# EAGLE board YaoGuai_SOUND_v1 (EAGLE 8.1.1)
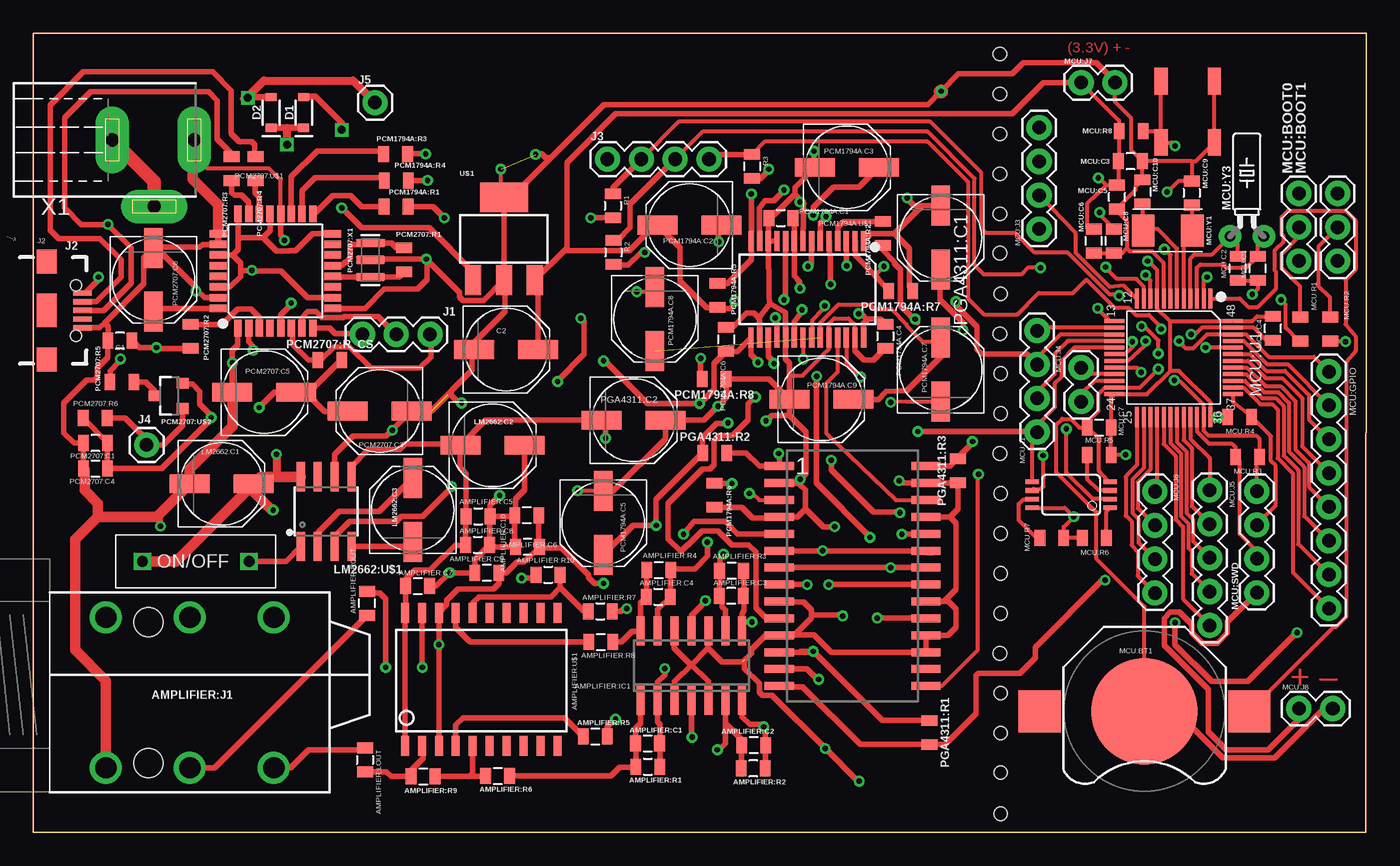
[diagram p0: board, top side]
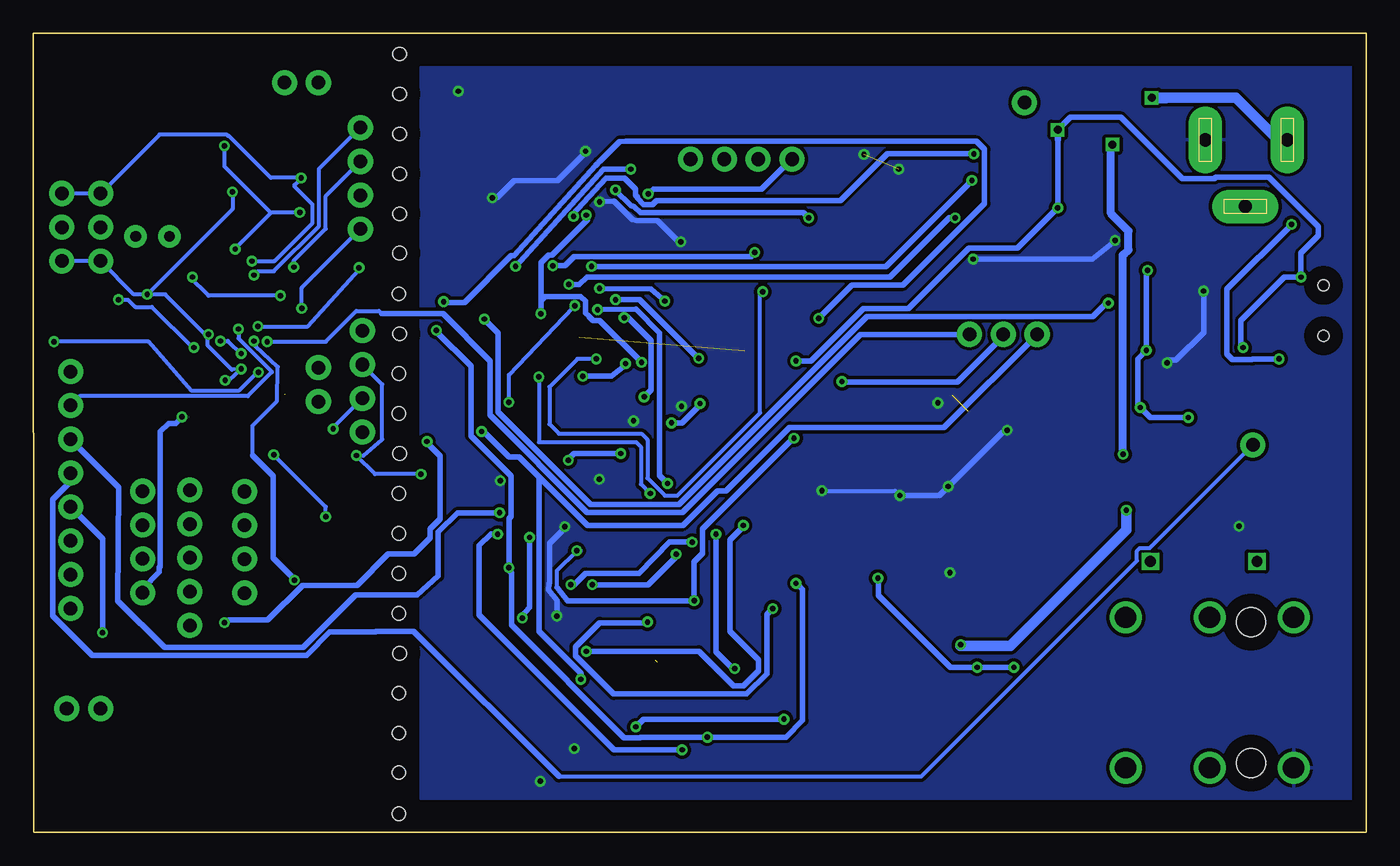
[diagram p1: board, bottom side, seen from below]

Size 100.05 x 60 mm. Coordinates in mm from the lower left corner, seen from the top.
Outline: 0,60 100.05,60 100,0 0,0 0,60
Copper layers (1*16): Top 0.035mm / dielectric 1.5mm / Bottom 0.035mm
Design rules "default *": minimum track width 10mil, minimum drill 24mil, track to track 8mil, track to pad 8mil, pad to pad 8mil, via to via 8mil, smd to smd 8mil, copper to edge 40mil, drill to drill 8mil, minimum pad ring 10mil, minimum via ring 8mil, stop-mask expansion 4mil, vias tented up to drill 0mil, thermal gap 10mil
Holes 1 mm at 72.6,1.4 72.6,4.5 72.6,7.45 72.6,10.45 72.55,13.45 72.6,16.45 72.6,19.45 72.6,22.45 72.6,25.45 72.55,28.45 72.6,31.45 72.6,34.45 72.55,37.45 72.6,40.45 72.55,43.5 72.55,46.45 72.55,49.45 72.55,52.45 72.55,55.45 72.55,58.45

## Footprints (pad centres in the part's own frame; a part is rotated, then mirrored left to right if it is on the bottom)
0805 = smd 0.8 x 1.2: 1 -0.9,0; 2 0.9,0
SO14 = smd 0.6 x 2.2: 1 -3.81,-2.6; 2 -2.54,-2.6; 3 -1.27,-2.6; 4 0,-2.6; 5 1.27,-2.6; 6 2.54,-2.6; 7 3.81,-2.6; 8 3.81,2.6; 9 2.54,2.6; 10 1.27,2.6; 11 0,2.6; 12 -1.27,2.6; 13 -2.54,2.6; 14 -3.81,2.6
AUDIO_JACK_0.25"_TRS_PTH_RA = drill 1.6: RING 10.5,-6.95; RING-NORM 10.5,4.35; SLEEVE 4.2,-6.95; SLEEVE-NORM 4.2,4.35; TIP 16.8,-6.95; TIP-NORM 16.8,4.35 | hole 2.2: 7.4,4; 7.4,-6.6
SOIC20S = smd 0.6 x 1.5: 1 -5.715,-5; 2 -4.445,-5; 3 -3.175,-5; 4 -1.905,-5; 5 -0.635,-5; 6 0.635,-5; 7 1.905,-5; 8 3.175,-5; 9 4.445,-5; 10 5.715,-5; 11 5.715,5; 12 4.445,5; 13 3.175,5; 14 1.905,5; 15 0.635,5; 16 -0.635,5; 17 -1.905,5; 18 -3.175,5; 19 -4.445,5; 20 -5.715,5
PANASONIC_D = smd 3 x 1.4: + 2.4,0; - -2.4,0
SOD-323 = smd 0.63 x 0.83: A 1.15,0; C -1.15,0
1X03 = drill 1.016 pad 1.88: 1 0,0; 2 2.54,0; 3 5.08,0
USB-AB-MICRO-SMD = smd 1.4 x 0.4: D+1 2.7,0; D-1 2.7,0.65; GND1 2.7,-1.3; ID1 2.7,-0.65; VBUS1 2.7,1.3 | smd 1.5 x 1.8: SHLD1 0,-3.68; SHLD2 0,3.68 | smd 1.5 x 2.5: SHLD3 0,0 | hole 0.85: 2.2,1.9; 2.2,-1.9
1X04 = drill 1.016 pad 1.88: 1 0,0; 2 2.54,0; 3 5.08,0; 4 7.62,0
1X01 = drill 1.016 pad 1.88: 1 0,0
SOIC-8 = smd 0.61 x 2.21: 1 -1.905,-2.616; 2 -0.635,-2.616; 3 0.635,-2.616; 4 1.905,-2.616; 5 1.905,2.616; 6 0.635,2.616; 7 -0.635,2.616; 8 -1.905,2.616
RED_SWITCH = drill 0.8 square: P$1 -4,0; P$2 4,0
BATTCON_12MM = smd 8 x 8: GND 0,0 | smd 3.175 x 3.175: PWR@1 -7.874,0; PWR@2 7.874,0
1X08 = drill 1.016 pad 1.88: 1 0,0; 2 2.54,0; 3 5.08,0; 4 7.62,0; 5 10.16,0; 6 12.7,0; 7 15.24,0; 8 17.78,0
1X02 = drill 1.016 pad 1.88: 1 0,0; 2 2.54,0
1X05 = drill 1.016 pad 1.88: 1 0,0; 2 2.54,0; 3 5.08,0; 4 7.62,0; 5 10.16,0
LQFP48-0.5-7X7MM = smd 1.5 x 0.3: 1 -4.45,2.75; 2 -4.45,2.25; 3 -4.45,1.75; 4 -4.45,1.25; 5 -4.45,0.75; 6 -4.45,0.25; 7 -4.45,-0.25; 8 -4.45,-0.75; 9 -4.45,-1.25; 10 -4.45,-1.75; 11 -4.45,-2.25; 12 -4.45,-2.75; 25 4.45,-2.75; 26 4.45,-2.25; 27 4.45,-1.75; 28 4.45,-1.25; 29 4.45,-0.75; 30 4.45,-0.25; 31 4.45,0.25; 32 4.45,0.75; 33 4.45,1.25; 34 4.45,1.75; 35 4.45,2.25; 36 4.45,2.75 | smd 0.3 x 1.5: 13 -2.75,-4.45; 14 -2.25,-4.45; 15 -1.75,-4.45; 16 -1.25,-4.45; 17 -0.75,-4.45; 18 -0.25,-4.45; 19 0.25,-4.45; 20 0.75,-4.45; 21 1.25,-4.45; 22 1.75,-4.45; 23 2.25,-4.45; 24 2.75,-4.45; 37 2.75,4.45; 38 2.25,4.45; 39 1.75,4.45; 40 1.25,4.45; 41 0.75,4.45; 42 0.25,4.45; 43 -0.25,4.45; 44 -0.75,4.45; 45 -1.25,4.45; 46 -1.75,4.45; 47 -2.25,4.45; 48 -2.75,4.45
TSSOP8 = smd 0.35 x 1: 1 -0.975,-2.925; 2 -0.325,-2.925; 3 0.325,-2.925; 4 0.975,-2.925; 5 0.975,2.925; 6 0.325,2.925; 7 -0.325,2.925; 8 -0.975,2.925
PUSHBUTTON_4X4 = smd 1 x 2: P$1 2,2.3; P$2 2,-2.3; P$3 -2,-2.3; P$4 -2,2.3
CRYSTAL-TXC-7A = smd 1.7 x 2.4: P$1 1.85,0; P$2 -1.85,0
CRYSTAL-PTH-2X6-CYL-KIT = drill 0.813 pad 1.676: 1 -1.27,0; 2 1.27,0
SSOP28-0.65-10.2X5.2MM = smd 0.4 x 1.5: 1 -4.225,-3.625; 2 -3.575,-3.625; 3 -2.925,-3.625; 4 -2.275,-3.625; 5 -1.625,-3.625; 6 -0.975,-3.625; 7 -0.325,-3.625; 8 0.325,-3.625; 9 0.975,-3.625; 10 1.625,-3.625; 11 2.275,-3.625; 12 2.925,-3.625; 13 3.575,-3.625; 14 4.225,-3.625; 15 4.225,3.625; 16 3.575,3.625; 17 2.925,3.625; 18 2.275,3.625; 19 1.625,3.625; 20 0.975,3.625; 21 0.325,3.625; 22 -0.325,3.625; 23 -0.975,3.625; 24 -1.625,3.625; 25 -2.275,3.625; 26 -2.925,3.625; 27 -3.575,3.625; 28 -4.225,3.625
TQFP32-0.8-7X7MM = smd 1.27 x 0.559: 1 -4.293,2.8; 2 -4.293,2; 3 -4.293,1.2; 4 -4.293,0.4; 5 -4.293,-0.4; 6 -4.293,-1.2; 7 -4.293,-2; 8 -4.293,-2.8; 17 4.293,-2.8; 18 4.293,-2; 19 4.293,-1.2; 20 4.293,-0.4; 21 4.293,0.4; 22 4.293,1.2; 23 4.293,2; 24 4.293,2.8 | smd 0.559 x 1.27: 9 -2.8,-4.293; 10 -2,-4.293; 11 -1.2,-4.293; 12 -0.4,-4.293; 13 0.4,-4.293; 14 1.2,-4.293; 15 2,-4.293; 16 2.8,-4.293; 25 2.8,4.293; 26 2,4.293; 27 1.2,4.293; 28 0.4,4.293; 29 -0.4,4.293; 30 -1.2,4.293; 31 -2,4.293; 32 -2.8,4.293
SOT23-3 = smd 0.8 x 0.9: 1 -0.95,-1; 2 0.95,-1; 3 0,1.1
RESONATOR-SMD-3.2X1.3 = smd 0.61 x 2.184: 1 -1.283,-0.006; 2 0,0; 3 1.27,-0.006
SOP28 = smd 0.6 x 2.2: 1 -8.255,-5.5; 2 -6.985,-5.5; 3 -5.715,-5.5; 4 -4.445,-5.5; 5 -3.175,-5.5; 6 -1.905,-5.5; 7 -0.635,-5.5; 8 0.635,-5.5; 9 1.905,-5.5; 10 3.175,-5.5; 11 4.445,-5.5; 12 5.715,-5.5; 13 6.985,-5.5; 14 8.255,-5.5; 15 8.255,5.5; 16 6.985,5.5; 17 5.715,5.5; 18 4.445,5.5; 19 3.175,5.5; 20 1.905,5.5; 21 0.635,5.5; 22 -0.635,5.5; 23 -1.905,5.5; 24 -3.175,5.5; 25 -4.445,5.5; 26 -5.715,5.5; 27 -6.985,5.5; 28 -8.255,5.5
SOT223 = smd 1.219 x 2.235: 1 -2.311,-3.099; 2 0,-3.099; 3 2.311,-3.099 | smd 3.6 x 2.2: 4 0,3.099
733980-62 = drill 1 pad 2.5 long: 1 0,8.57; 2 0,2.42; 3 5,5.57

## Placement (x,y rotation side)
AMPLIFIER:C1  2.7nF  [0805]  46.11,6.69 0 top
AMPLIFIER:C2  2.7nF  [0805]  54.07,6.56 180 top
AMPLIFIER:C3  2.7nF  [0805]  52.4,17.76 180 top
AMPLIFIER:C4  2.7nF  [0805]  46.92,17.69 0 top
AMPLIFIER:C5  0.1uF  [0805]  33.39,23.74 0 top
AMPLIFIER:C6  0.1uF  [0805]  37.04,23.81 180 top
AMPLIFIER:C7  0.1uF  [0805]  28.85,18.5 0 top
AMPLIFIER:C8  10uF  [0805]  33.35,21.6 0 top
AMPLIFIER:C9  0.1uF  [0805]  34.05,19.5 180 top
AMPLIFIER:C10  10uF  [0805]  37.1,21.45 180 top
AMPLIFIER:IC1  OPA4134D  [SO14]  49.4,12.53 0 top
AMPLIFIER:J1  AUDIO_JACK_TRS_0.25"_PTH_RA  [AUDIO_JACK_0.25"_TRS_PTH_RA]  1.25,11.8 0 top
AMPLIFIER:LOUT  50  [0805]  24.9,5.45 270 top
AMPLIFIER:R1  1K  [0805]  46.13,4.94 0 top
AMPLIFIER:R2  1K  [0805]  54.05,4.81 180 top
AMPLIFIER:R3  1K  [0805]  52.41,19.65 180 top
AMPLIFIER:R4  1K  [0805]  46.96,19.7 0 top
AMPLIFIER:R5  1K  [0805]  42.18,7.2 0 top
AMPLIFIER:R6  1K  [0805]  34.85,4.25 0 top
AMPLIFIER:R7  1K  [0805]  42.57,16.6 0 top
AMPLIFIER:R8  1K  [0805]  42.59,14.3 0 top
AMPLIFIER:R9  1K  [0805]  29.26,4.2 0 top
AMPLIFIER:R10  1K  [0805]  38.64,19.34 0 top
AMPLIFIER:ROUT  50  [0805]  25.05,17.2 90 top
AMPLIFIER:U$1  TPA6120A2  [SOIC20S]  33.62,11.5 0 top
C1  1.5uF  [0805]  6.51,36.92 180 top
C2  220uF  [PANASONIC_D]  35.5,36.26 0 top
D1  0.5A/40V/420mV  [SOD-323]  20.3,54.05 90 top
D2  0.5A/40V/420mV  [SOD-323]  17.85,54.05 90 top
J1  [1X03]  24.7,37.4 0 top
J2  [USB-AB-MICRO-SMD]  0.99,39.19 0 top
J3  [1X04]  43.1,50.55 0 top
J4  [1X01]  8.5,29.1 0 top
J5  [1X01]  25.65,54.8 0 top
LM2662:C1  150nF  [PANASONIC_D]  14.13,26.17 0 top
LM2662:C2  47uF  [PANASONIC_D]  34.47,29.07 0 top
LM2662:C3  47uF  [PANASONIC_D]  28.48,24.21 90 top
LM2662:U$1  LM2662  [SOIC-8]  21.99,24.09 0 top
LM2662:U$2  RED_SWITCH_ON  [RED_SWITCH]  12.2,20.35 180 top
MCU:BOOT0  [1X03]  95,42.9 90 top
MCU:BOOT1  [1X03]  97.9,42.9 90 top
MCU:BT1  [BATTCON_12MM]  83.4,9.1 180 top
MCU:C1  22pF  [0805]  91.9,42.35 90 top
MCU:C2  22pF  [0805]  90.4,42.35 90 top
MCU:C3  1uF  [0805]  82.35,50.4 180 top
MCU:C4  1uF  [0805]  93.05,37.85 90 top
MCU:C5  1uF  [0805]  81.35,47.7 90 top
MCU:C6  1uF  [0805]  79.6,44.4 90 top
MCU:C7  1uF  [0805]  80,30.4 0 top
MCU:C8  22pF  [0805]  81.1,44.4 90 top
MCU:C9  22pF  [0805]  86.95,48 270 top
MCU:C10  22pF  [0805]  83.25,48.1 270 top
MCU:GPIO  [1X08]  97.25,34.6 270 top
MCU:J1  SPI1  [1X04]  75.35,30.05 90 top
MCU:J3  USART2  [1X04]  75.5,45.3 90 top
MCU:J4  I2C_2  [1X02]  78.65,32.35 90 top
MCU:J5  USART1  [1X05]  88.3,25.7 270 top
MCU:J6  SPI2  [1X04]  84.2,25.6 270 top
MCU:J7  POWER  [1X02]  78.65,56.3 0 top
MCU:J8  POWER  [1X02]  95,9.3 0 top
MCU:R1  100K  [0805]  95.1,37.8 270 top
MCU:R2  100K  [0805]  97.35,37.8 270 top
MCU:R3  10K  [0805]  91.15,28.2 180 top
MCU:R4  10K  [0805]  90.55,31.2 180 top
MCU:R5  100K  [0805]  80,28.35 0 top
MCU:R6  100K  [0805]  79.65,22.1 180 top
MCU:R7  100K  [0805]  76.45,22.1 0 top
MCU:R8  100K  [0805]  82.4,52.65 180 top
MCU:SWD  [1X04]  91.85,18 90 top
MCU:U1  STM32F103CBT6-LQFP48  [LQFP48-0.5-7X7MM]  85.6,35.65 270 top
MCU:U$1  M95320-D  [TSSOP8]  77.9,25.35 90 top
MCU:U$2  PUSHBUTTON  [PUSHBUTTON_4X4]  86.65,54.1 180 top
MCU:Y1  [CRYSTAL-TXC-7A]  85.15,45.2 180 top
MCU:Y3  32.768kHz  [CRYSTAL-PTH-2X6-CYL-KIT]  91.1,44.75 0 top
PCM1794A:C1  0.1uF  [0805]  56.12,46.14 0 top
PCM1794A:C2  10uF  [PANASONIC_D]  49.25,45.6 180 top
PCM1794A:C3  10uF  [PANASONIC_D]  61.07,49.94 0 top
PCM1794A:C4  0.1uF  [0805]  63.96,37.26 270 top
PCM1794A:C5  10uF  [PANASONIC_D]  42.78,23.23 270 top
PCM1794A:C6  0.1uF  [0805]  52.01,37.02 270 top
PCM1794A:C7  47uF  [PANASONIC_D]  68.11,34.75 90 top
PCM1794A:C8  47uF  [PANASONIC_D]  46.66,38.55 270 top
PCM1794A:C9  10uF  [PANASONIC_D]  59.15,32.52 0 top
PCM1794A:R1  27  [0805]  27.23,46.98 0 top
PCM1794A:R2  27  [0805]  63.76,44.97 90 top
PCM1794A:R3  27  [0805]  27.2,50.93 0 top
PCM1794A:R4  27  [0805]  27.25,48.94 0 top
PCM1794A:R5  27  [0805]  51.35,40.32 270 top
PCM1794A:R6  10K  [0805]  51.14,25.31 270 top
PCM1794A:R7  100K  [0805]  65.1,40.65 180 top
PCM1794A:R8  100K  [0805]  51.1,34.05 180 top
PCM1794A:U$1  PCM1794A  [SSOP28-0.65-10.2X5.2MM]  58.1,40.78 180 top
PCM2707:C1  1uF  [0805]  4.66,29.23 180 top
PCM2707:C3  0.1uF  [PANASONIC_D]  25.98,31.64 180 top
PCM2707:C4  1uF  [0805]  4.66,27.32 0 top
PCM2707:C5  10uF  [PANASONIC_D]  17.34,33.06 0 top
PCM2707:C6  10uF  [PANASONIC_D]  9.01,41.49 270 top
PCM2707:R1  1M  [0805]  27.83,42.99 90 top
PCM2707:R2  1M  [0805]  11.83,37.24 90 top
PCM2707:R3  22  [0805]  14.88,49.84 90 top
PCM2707:R4  22  [0805]  16.68,49.84 90 top
PCM2707:R5  1.5K  [0805]  6.66,33.83 180 top
PCM2707:R6  1M  [0805]  4.65,31.1 0 top
PCM2707:R_CS  100k  [0805]  22.25,35.45 0 top
PCM2707:U$1  PCM2707  [TQFP32-0.8-7X7MM]  18.17,42.15 90 top
PCM2707:U$2  IRLML2246TRPBF  [SOT23-3]  10.22,32.78 90 top
PCM2707:X1  12MHz  [RESONATOR-SMD-3.2X1.3]  25.31,42.99 90 top
PGA4311:C1  [PANASONIC_D]  68.1,44.65 270 top
PGA4311:C2  [PANASONIC_D]  45.05,30.95 0 top
PGA4311:R1  [0805]  67.25,7.5 270 top
PGA4311:R2  100K  [0805]  51.15,28.5 0 top
PGA4311:R3  100K  [0805]  69.4,27.15 90 top
PGA4311:U$1  PGA4311  [SOP28]  61.5,19.25 270 top
R1  20  [0805]  43.5,47.05 270 top
R2  20  [0805]  43.55,43.55 270 top
R3  20  [0805]  53.95,50 270 top
U$1  LM3940IMP-3.3/NOPB  [SOT223]  35.33,44.57 0 top
X1  [733980-62]  3.5,52 270 top

## Library data of the parts
AMPLIFIER:C1-AMPLIFIER:C10 AMPLIFIER:LOUT AMPLIFIER:R1-AMPLIFIER:R10 AMPLIFIER:ROUT C1 C2 LM2662:C1-LM2662:C3 MCU:C1-MCU:C10 PCM1794A:C1-PCM1794A:C9 PCM2707:C1 PCM2707:C3-PCM2707:C6 PGA4311:C1 PGA4311:C2 R1-R3 = SparkFun-Passives
AMPLIFIER:IC1 = linear
AMPLIFIER:J1 = SparkFun-Connectors; PROD_ID: CONN-12339; SF_ID: COM-11144
AMPLIFIER:U$1 LM2662:U$1 LM2662:U$2 MCU:U$1 MCU:U$2 PCM1794A:U$1 PCM2707:U$1 PCM2707:U$2 PGA4311:U$1 U$1 = EduAreaLib
D1 D2 = SparkFun-DiscreteSemi; PROD_ID: DIO-10955
J1 J4 J5 MCU:J4 MCU:J5 MCU:J7 MCU:J8 = SparkFun-Connectors
J2 = SparkFun-Connectors; PROD_ID: CONN-11794
J3 MCU:J1 MCU:J3 MCU:J6 MCU:SWD = SparkFun-Connectors; PROD_ID: CONN-09696
MCU:BOOT0 MCU:BOOT1 = SparkFun-Retired
MCU:BT1 = SparkFun-Batteries; PROD_ID: BATT-08044; SF_SKU: PRT-10592
MCU:GPIO = SparkFun-Connectors; PROD_ID: CONN-08438
MCU:R1-MCU:R8 PCM1794A:R1-PCM1794A:R8 PCM2707:R1-PCM2707:R6 PCM2707:R_CS PGA4311:R1-PGA4311:R3 = SparkFun-Resistors
MCU:U1 = Seeed-OPL-ic; MPN: STM32F103CBT6
MCU:Y1 = SparkFun-FreqCtrl
MCU:Y3 = SparkFun-Clocks; PROD_ID: XTAL-10112
PCM2707:X1 = SparkFun-Clocks; PROD_ID: XTAL-08895
X1 = con-conrad

## Nets
3.3V: C2.+ MCU:BOOT0.3 MCU:BOOT1.3 MCU:C3.2 MCU:C4.2 MCU:C5.2 MCU:C6.2 MCU:C7.2 MCU:J7.1 MCU:J8.1 MCU:R4.2 MCU:R5.2 MCU:R6.2 MCU:R7.2 MCU:R8.2 MCU:SWD.1 MCU:U1.9 MCU:U1.24 MCU:U1.36 MCU:U1.48 MCU:U$1.8 PCM1794A:C1.2 PCM1794A:C2.+ PCM1794A:R5.2 PCM1794A:U$1.9 U$1.3
!MUTE!: MCU:GPIO.3 MCU:U1.43 PGA4311:R2.2 PGA4311:U$1.1
!PCM2702_CS!: J1.3 MCU:U1.18 PCM2707:R_CS.1 PCM2707:U$1.6
!PGA4311_CS!: MCU:U1.19 PGA4311:R1.2 PGA4311:U$1.14
AMPLIFIER:N$1: AMPLIFIER:C1.1 AMPLIFIER:IC1.1 AMPLIFIER:R1.1 AMPLIFIER:R6.2
AMPLIFIER:N$2: AMPLIFIER:R6.1 AMPLIFIER:R9.2 AMPLIFIER:U$1.5
AMPLIFIER:N$3: AMPLIFIER:R5.1 AMPLIFIER:U$1.4
AMPLIFIER:N$4: AMPLIFIER:C2.1 AMPLIFIER:IC1.7 AMPLIFIER:R2.1 AMPLIFIER:R5.2
AMPLIFIER:N$5: AMPLIFIER:R7.1 AMPLIFIER:R10.2 AMPLIFIER:U$1.16
AMPLIFIER:N$6: AMPLIFIER:R8.1 AMPLIFIER:U$1.17
AMPLIFIER:N$7: AMPLIFIER:C3.1 AMPLIFIER:IC1.8 AMPLIFIER:R3.1 AMPLIFIER:R7.2
AMPLIFIER:N$8: AMPLIFIER:LOUT.2 AMPLIFIER:R9.1 AMPLIFIER:U$1.2
AMPLIFIER:N$9: AMPLIFIER:R10.1 AMPLIFIER:ROUT.2 AMPLIFIER:U$1.19
AMPLIFIER:N$10: AMPLIFIER:C4.1 AMPLIFIER:IC1.14 AMPLIFIER:R4.1 AMPLIFIER:R8.2
AMPLIFIER:N$11: AMPLIFIER:J1.RING AMPLIFIER:ROUT.1
AMPLIFIER:N$12: AMPLIFIER:J1.TIP AMPLIFIER:LOUT.1
CHSL: PCM1794A:R7.2 PCM1794A:U$1.2 R3.2
DEM: PCM1794A:U$1.3 R2.2
EXT+5V: D2.A J5.1 X1.2 X1.3
GND: AMPLIFIER:C5.2 AMPLIFIER:C6.2 AMPLIFIER:C7.2 AMPLIFIER:C8.2 AMPLIFIER:C9.2 AMPLIFIER:C10.2 AMPLIFIER:IC1.3 AMPLIFIER:IC1.5 AMPLIFIER:IC1.10 AMPLIFIER:IC1.12 AMPLIFIER:J1.SLEEVE C1.2 C2.- J2.GND1 LM2662:C1.- LM2662:C2.+ LM2662:U$1.3 LM2662:U$1.6 MCU:BOOT0.1 MCU:BOOT1.1 MCU:BT1.GND MCU:C1.1 MCU:C2.1 MCU:C3.1 MCU:C4.1 MCU:C5.1 MCU:C6.1 MCU:C7.1 MCU:C8.1 MCU:C9.1 MCU:C10.1 MCU:J7.2 MCU:J8.2 MCU:R3.1 MCU:SWD.4 MCU:U1.8 MCU:U1.23 MCU:U1.35 MCU:U1.47 MCU:U$1.4 MCU:U$2.P$3 MCU:U$2.P$4 PCM1794A:C1.1 PCM1794A:C2.- PCM1794A:C3.- PCM1794A:C4.2 PCM1794A:C5.- PCM1794A:C6.1 PCM1794A:C9.- PCM1794A:R6.2 PCM1794A:R7.1 PCM1794A:R8.1 PCM1794A:U$1.1 PCM1794A:U$1.8 PCM1794A:U$1.11 PCM1794A:U$1.12 PCM1794A:U$1.16 PCM1794A:U$1.19 PCM1794A:U$1.24 PCM1794A:U$1.27 PCM2707:C1.2 PCM2707:C3.- PCM2707:C4.1 PCM2707:C5.- PCM2707:C6.- PCM2707:U$1.1 PCM2707:U$1.9 PCM2707:U$1.20 PCM2707:U$1.25 PCM2707:U$1.26 PCM2707:U$1.31 PCM2707:X1.2 PGA4311:C1.- PGA4311:C2.+ PGA4311:R3.1 PGA4311:U$1.2 PGA4311:U$1.4 PGA4311:U$1.9 PGA4311:U$1.11 PGA4311:U$1.17 PGA4311:U$1.18 PGA4311:U$1.20 PGA4311:U$1.25 PGA4311:U$1.27 U$1.2 U$1.4 X1.1
LM2662:FC: LM2662:U$1.1 LM2662:U$2.P$1
LM2662:N$1: LM2662:C3.+ LM2662:U$1.2
LM2662:N$2: LM2662:C3.- LM2662:U$1.4
MCU:!EEPROM_CS!: MCU:R6.1 MCU:U$1.1
MCU:!EEPROM_HOLD!: MCU:R7.1 MCU:U$1.7
MCU:!RST!: MCU:C8.2 MCU:R8.1 MCU:U1.7 MCU:U$2.P$1 MCU:U$2.P$2
MCU:!W!: MCU:R5.1 MCU:U$1.3
MCU:I2C2_SCL: MCU:J4.2 MCU:U1.21
MCU:I2C2_SDA: MCU:J4.1 MCU:U1.22
MCU:N$1: MCU:BT1.PWR@1 MCU:U1.1
MCU:N$2: MCU:C10.2 MCU:U1.6 MCU:Y1.P$1
MCU:N$3: MCU:C9.2 MCU:U1.5 MCU:Y1.P$2
MCU:N$4: MCU:C2.2 MCU:U1.4 MCU:Y3.1
MCU:N$5: MCU:C1.2 MCU:U1.3 MCU:Y3.2
MCU:N$6: MCU:J5.3 MCU:U1.31
MCU:N$7: MCU:BOOT0.2 MCU:R1.1
MCU:N$8: MCU:R1.2 MCU:U1.44
MCU:N$9: MCU:J5.2 MCU:U1.32
MCU:N$10: MCU:BOOT1.2 MCU:R2.1
MCU:N$11: MCU:R2.2 MCU:U1.20
MCU:N$12: MCU:J5.1 MCU:U1.33
MCU:N$14: MCU:J5.4 MCU:U1.30
MCU:N$15: MCU:J5.5 MCU:U1.29
MCU:PA15: MCU:GPIO.8 MCU:U1.38
MCU:PB3: MCU:GPIO.7 MCU:U1.39
MCU:PB4: MCU:GPIO.6 MCU:U1.40
MCU:SPI1_MISO: MCU:J1.2 MCU:U1.16 MCU:U$1.2
MCU:SPI1_NSS: MCU:J1.4 MCU:U1.14
MCU:SPI2_MISO: MCU:J6.2 MCU:U1.27
MCU:SPI2_MOSI: MCU:J6.1 MCU:U1.28
MCU:SPI2_NSS: MCU:J6.4 MCU:U1.25
MCU:SPI2_SCK: MCU:J6.3 MCU:U1.26
MCU:SWDCLK: MCU:R4.1 MCU:SWD.3 MCU:U1.37
MCU:SWDIO: MCU:R3.2 MCU:SWD.2 MCU:U1.34
MCU:USART2_CTS: MCU:J3.4 MCU:U1.10
MCU:USART2_RTS: MCU:J3.3 MCU:U1.11
MCU:USART2_RX: MCU:J3.1 MCU:U1.13
MCU:USART2_TX: MCU:J3.2 MCU:U1.12
N$1: J2.D-1 PCM2707:R4.2
N$2: J2.D+1 PCM2707:R3.2 PCM2707:R5.2
N$3: PCM1794A:U$1.26 PGA4311:U$1.3
N$4: PCM1794A:U$1.25 PGA4311:U$1.26
N$5: PCM1794A:R4.1 PCM2707:U$1.18
N$6: PCM1794A:R2.1 PCM2707:U$1.5
N$7: PCM1794A:R3.1 PCM2707:U$1.19
N$8: PCM1794A:R1.1 PCM2707:U$1.17
N$9: PCM1794A:U$1.18 PGA4311:U$1.10
N$10: PCM1794A:U$1.17 PGA4311:U$1.19
N$11: J3.2 MCU:U1.2 R1.1
N$12: J3.3 MCU:GPIO.1 MCU:U1.46 R2.1
N$13: J3.4 MCU:GPIO.2 MCU:U1.45 R3.1
N$14: J3.1 PCM1794A:R5.1 PCM1794A:U$1.14
N$20: AMPLIFIER:C3.2 AMPLIFIER:IC1.9 AMPLIFIER:R3.2 PGA4311:U$1.8
N$21: AMPLIFIER:C4.2 AMPLIFIER:IC1.13 AMPLIFIER:R4.2 PGA4311:U$1.21
N$22: AMPLIFIER:C2.2 AMPLIFIER:IC1.6 AMPLIFIER:R2.2 PGA4311:U$1.24
N$23: AMPLIFIER:C1.2 AMPLIFIER:IC1.2 AMPLIFIER:R1.2 PGA4311:U$1.5
PCM1794A:MUTE: PCM1794A:R8.2 PCM1794A:U$1.10
PCM1794A:N$1: PCM1794A:R4.2 PCM1794A:U$1.7
PCM1794A:N$2: PCM1794A:R3.2 PCM1794A:U$1.6
PCM1794A:N$3: PCM1794A:R1.2 PCM1794A:U$1.5
PCM1794A:N$4: PCM1794A:R6.1 PCM1794A:U$1.20
PCM1794A:N$5: PCM1794A:R2.2 PCM1794A:U$1.4
PCM1794A:N$9: PCM1794A:C7.- PCM1794A:U$1.22
PCM1794A:N$10: PCM1794A:C8.- PCM1794A:U$1.21
PCM1794A:V+: PCM1794A:C7.+ PCM1794A:C8.+ PCM1794A:C9.+ PCM1794A:U$1.23
PCM2707:DIN: PCM2707:U$1.4
PCM2707:INTRNL_D+: PCM2707:R3.1 PCM2707:U$1.23
PCM2707:INTRNL_D-: PCM2707:R4.1 PCM2707:U$1.22
PCM2707:INTRNL_HOST: PCM2707:R2.2 PCM2707:U$1.3
PCM2707:N$9: PCM2707:R5.1 PCM2707:U$2.3
PCM2707:RESONATOR_XTI: PCM2707:R1.1 PCM2707:U$1.12 PCM2707:X1.1
PCM2707:RESONATOR_XTO: PCM2707:R1.2 PCM2707:U$1.13 PCM2707:X1.3
PCM2707:USB+5V: PCM2707:C1.1 PCM2707:C3.+ PCM2707:C4.2 PCM2707:C5.+ PCM2707:R6.1 PCM2707:R_CS.2 PCM2707:U$1.2 PCM2707:U$1.10 PCM2707:U$1.16 PCM2707:U$1.21 PCM2707:U$1.24 PCM2707:U$1.27 PCM2707:U$1.30 PCM2707:U$2.2
PCM2707:VCOM: PCM2707:C6.+ PCM2707:U$1.32
PULLUP_D+: J4.1 MCU:GPIO.4 MCU:U1.42 PCM2707:R6.2 PCM2707:U$2.1
SPI_MOSI: J1.1 MCU:J1.1 MCU:U1.17 MCU:U$1.5 PCM2707:U$1.8 PGA4311:U$1.13
SPI_SCK: J1.2 MCU:J1.3 MCU:U1.15 MCU:U$1.6 PCM2707:U$1.7 PGA4311:U$1.15
USB+5V: C1.1 D1.A J2.VBUS1 PCM1794A:C3.+ PCM1794A:C4.1 PCM1794A:C5.+ PCM1794A:C6.2 PCM1794A:U$1.15 PCM1794A:U$1.28 PCM2707:R2.1 PGA4311:R1.1 PGA4311:R2.1 PGA4311:U$1.12 U$1.1
V+: AMPLIFIER:C6.1 AMPLIFIER:C9.1 AMPLIFIER:C10.1 AMPLIFIER:IC1.4 AMPLIFIER:U$1.3 AMPLIFIER:U$1.18 D1.C D2.C LM2662:C1.+ LM2662:U$1.8 LM2662:U$2.P$2 PGA4311:C1.+ PGA4311:U$1.7 PGA4311:U$1.22
V-: AMPLIFIER:C5.1 AMPLIFIER:C7.1 AMPLIFIER:C8.1 AMPLIFIER:IC1.11 AMPLIFIER:U$1.1 AMPLIFIER:U$1.20 LM2662:C2.- LM2662:U$1.5 PGA4311:C2.- PGA4311:U$1.6 PGA4311:U$1.23
ZCEN: MCU:GPIO.5 MCU:U1.41 PGA4311:R3.2 PGA4311:U$1.28
ZERO: PCM1794A:U$1.13 R1.2

## Tracks (layer width: path | path; a pad name or v marks a point on that pad's centre or on a via)
3.3V  (via drill 0.4)  (3 unrouted)
  Top 0.3: MCU:J7.1 81.5,53.45 MCU:R8.2 81.5,50.45 MCU:C3.2 81.45,48.7 MCU:C5.2 80.55,48.6 | 80.55,48.6 79.1,47.2 79.1,45.4 MCU:C6.2 | v83.65,42.9 83.7,42.85 83.75,42.85 84.35,42.25 MCU:U1.9 84.35,39.35 85.3,38.4 | v79.95,49.15 80,49.15 80.55,48.6 | 85.3,38.4 89.15,38.4 MCU:U1.48 | MCU:U1.48 91.5,38.4 91.85,38.75 MCU:C4.2 | MCU:U1.24 83.6,32.9 85.35,34.65 | 85.35,34.65 85.35,38.35 85.3,38.4 | MCU:U1.36 88.35,32.3 86,34.65 85.35,34.65 | MCU:R4.2 v88.9,31.2 MCU:U1.36 | MCU:U1.24 80.9,32.65 MCU:C7.2 MCU:R5.2 v82,28.35 | MCU:R6.2 MCU:R7.2 77.35,22.95 77.95,23.55 78,23.55 78,23.6 v78.1,23.7 77.42,24.38 MCU:U$1.8
  Top 0.4: PCM1794A:C1.2 57.12,46.09 PCM1794A:U$1.9 57.12,41.77 57.5,41.35 57.45,41.45 v57.55,40.85 | v52.65,39.9 52.65,39.7 52.3,39.35 51.42,39.35 PCM1794A:R5.2 50.53,39.42 48.55,41.4 48.55,43.9 PCM1794A:C2.+ 46.4,45.6 46.4,45.35 44.75,43.7 39.87,43.7 | 39.87,43.7 U$1.3 37.9,41.21 C2.+ | MCU:J7.1 75.83,56.3 73.48,53.95 43.7,53.95 40.05,50.3 40.05,43.88 39.87,43.7 | MCU:J8.1 95,8.5 92.7,6.2 89.55,6.2 88.2,7.55 88.2,10.75 84.89,14.05 84.89,16.08 85.37,16.56 86.03,16.56 86.96,15.63 86.96,14.98 87.74,14.2 88.86,14.2 89.64,14.98 89.64,15.79 MCU:SWD.1
  Bottom 0.3: v83.65,42.9 81.95,42.9 79.1,45.75 79.1,47.15 80.45,48.5 80.45,48.6 79.9,49.15 v79.95,49.15 82.23,49.15 85.39,52.31 85.46,52.31 85.55,52.4 90.58,52.4 MCU:BOOT0.3 MCU:BOOT1.3 | v78.1,23.7 78.1,24.45 v82,28.35
  Bottom 0.4: v57.55,40.85 53.7,40.8 v52.65,39.9 | MCU:SWD.1 91.85,18.3 90.6,19.55 90.6,19.89 90.51,19.98 90.51,30.09 89.9,30.7 89.35,30.7 v88.9,31.2
!MUTE!  (via drill 0.4)
  Top 0.3: MCU:U1.43 91.3,35.9 92.55,34.65 93.95,34.65 95.75,32.85 95.75,31.02 MCU:GPIO.3
  Top 0.4: 52.15,28.7 52.05,28.6 PGA4311:R2.2 53.5,28.5 54.49,27.5 PGA4311:U$1.1 56,28.5 | 52.15,28.7 52.15,28.75 | 52.15,28.7 52.2,28.75 | 56,28.5 56.05,28.55 | 56,28.5 v55.95,28.45 | v59.9,27.95 59.9,27.2 63.05,24.05 65,24.05 v65.05,24
  Bottom 0.4: v55.95,28.45 59.45,28.45 59.95,27.95 v59.9,27.95 | v65.05,24 68.2,24 69.65,22.55 69.65,19.25 71.25,17.85 75.85,17.85 79.8,13.9 90.2,13.9 93.7,17.4 93.65,25.92 MCU:GPIO.3
!PCM2702_CS!  (via drill 0.4)
  Top 0.3: MCU:U1.18 81.95,35.9 82.55,36.5 82.55,36.8 v82.5,36.85
  Top 0.4: PCM2707:U$1.6 19.45,37.78 19.45,36.65 20.65,35.45 PCM2707:R_CS.1 21.58,35.45 22.58,36.45 23.75,36.45 25.35,34.85 29,34.85 29.85,35.7 29.85,37.33 J1.3
  Bottom 0.3: v82.5,36.85 78.1,36.85 75.8,39.15 74.1,39.15 73.9,38.95
  Bottom 0.4: J1.3 37.97,37.4 51.32,24.04 58.48,24.04 65.76,31.32 65.76,35.41 69.3,38.95 73.9,38.95
!PGA4311_CS!  (via drill 0.4)
  Top 0.3: v83.5,36.9 83.35,36.5 82.15,35.4 MCU:U1.19
  Top 0.4: PGA4311:U$1.14 56.05,10.95 57.75,10.95 62.1,6.6 PGA4311:R1.2 68.45,6.6 70.75,8.9 70.75,11.75 70.95,11.95 74.05,11.95 75.2,13.1 75.2,13.9 80.4,19.1 80.4,19 v80.45,18.95
  Bottom 0.3: 83.6,28.3 83.6,30.55 81.75,32.4 81.7,34.95 83.35,36.5 v83.5,36.9
  Bottom 0.4: v80.45,18.95 80.45,19 82.05,20.6 82.05,26.75 83.6,28.3
AMPLIFIER:N$1
  Top 0.4: AMPLIFIER:IC1.1 45.59,8.19 45.2,7.8 AMPLIFIER:C1.1 45.23,6.67 AMPLIFIER:R1.1 45.19,4.9 44,4.9 43.35,4.25 AMPLIFIER:R6.2
AMPLIFIER:N$2
  Top 0.4: 32.75,4.2 AMPLIFIER:R9.2 | 32.75,4.2 33.9,4.2 AMPLIFIER:R6.1 | AMPLIFIER:U$1.5 32.98,4.43 32.75,4.2
AMPLIFIER:N$3
  Top 0.4: AMPLIFIER:U$1.4 31.71,8.06 32.25,8.6 39.88,8.6 AMPLIFIER:R5.1
AMPLIFIER:N$4  (via drill 0.4)
  Top 0.4: AMPLIFIER:IC1.7 53.21,8.69 53.8,8.1 54.65,8.1 v54.83,7.92 54.95,7.8 54.95,6.58 AMPLIFIER:C2.1 54.97,4.83 AMPLIFIER:R2.1 | AMPLIFIER:R5.2 43.08,7.93 43.6,8.45 43.65,8.45 v43.7,8.5
  Bottom 0.4: v43.7,8.5 54.25,8.5 v54.83,7.92
AMPLIFIER:N$5
  Top 0.4: AMPLIFIER:U$1.16 32.98,17.23 33.45,17.7 38.85,17.7 39.55,18.4 | 39.55,18.4 AMPLIFIER:R10.2 | AMPLIFIER:R7.1 41.35,16.6 39.55,18.4
AMPLIFIER:N$6
  Top 0.4: AMPLIFIER:U$1.17 31.71,15.38 32.8,14.3 AMPLIFIER:R8.1
AMPLIFIER:N$7  (via drill 0.4)
  Top 0.4: 53.21,15.85 AMPLIFIER:IC1.8 | 53.21,15.85 53.21,16.36 53.35,16.7 AMPLIFIER:C3.1 53.36,17.77 AMPLIFIER:R3.1 | AMPLIFIER:R7.2 44.1,16.6 44.45,16.95 44.45,16.9 v44.55,16.8 | v53.95,15.8 53.26,15.8 53.21,15.85
  Bottom 0.4: v44.55,16.8 45,16.35 45,11.9 46.5,10.4 56.49,10.4 59.36,13.27 59.36,13.93 57.54,15.75 53.95,15.75 v53.95,15.8
AMPLIFIER:N$8
  Top 0.4: AMPLIFIER:U$1.2 29.25,6.42 29.25,5.55 28.36,4.66 AMPLIFIER:R9.1 26.85,4.2 26.5,4.55 AMPLIFIER:LOUT.2
AMPLIFIER:N$9  (via drill 0.4)
  Top 0.4: AMPLIFIER:U$1.19 29.18,12.43 29.15,12.4 v29.2,12.4 | v26.45,12.4 26.45,17.55 26,18 25.15,18 AMPLIFIER:ROUT.2 | v36.65,19.1 37.5,19.1 AMPLIFIER:R10.1
  Bottom 0.4: v26.45,12.4 26.5,12.45 26.6,12.45 26.65,12.4 v29.2,12.4 31.2,12.4 36.6,17.8 36.6,19.1 36.55,19.15 36.6,19.15 v36.65,19.1
AMPLIFIER:N$10
  Top 0.4: AMPLIFIER:R8.2 44.15,14.3 44.95,15.1 45.56,15.1 AMPLIFIER:IC1.14 45.59,17.26 AMPLIFIER:C4.1 46.02,19.66 AMPLIFIER:R4.1
AMPLIFIER:N$11
  Top 0.4: AMPLIFIER:J1.RING 13.6,4.85 AMPLIFIER:ROUT.1
AMPLIFIER:N$12
  Top 0.4: AMPLIFIER:J1.TIP 19.3,4.85 20.65,6.2 24.75,6.2 AMPLIFIER:LOUT.1
CHSL  (via drill 0.4)
  Top 0.3: v63.85,42.5 63.17,41.83
  Top 0.4: PCM1794A:R7.2 63.45,41.55 63.17,41.83 61.7,43.3 61.7,44.38 PCM1794A:U$1.2 | R3.2 54.6,49.1 55.25,49.75 v55.2,49.8
  Bottom 0.4: v55.2,49.8 57.25,49.8 v63.85,42.5
DEM  (via drill 0.4)
  Top 0.4: PCM1794A:U$1.3 61.02,42.38 61.05,42.35 v61.05,42.55 | v45.9,43.55 45.6,43.55 44.65,42.6 43.6,42.6 R2.2
  Bottom 0.4: v61.05,42.55 60.15,42.55 59.45,43.25 46.15,43.25 45.95,43.45 45.95,43.5 v45.9,43.55
EXT+5V  (via drill 0.6)
  Top 0.5: 15.75,55.1 v16.1,55.15 16.15,55.2 D2.A
  Top 0.61: v16.1,55.15 16.1,55.25 17.3,56.45 24,56.45 J5.1
  Top 1: X1.3 9.07,48.85 X1.2
  Bottom 0.5: 15.02,55.15 14.92,55.15
  Bottom 0.8: X1.2 6.65,52 9.8,55.15 14.92,55.15
  Bottom 0.813: v16.1,55.15 15.02,55.15
GND  (via drill 0.4)  (3 unrouted)
  Top 0.3: MCU:U$2.P$3 MCU:U$2.P$4 87.25,50.4 86.95,50.4 | MCU:J7.2 81.19,54.86 82.4,53.65 82.4,51.25 MCU:C3.1 | 86.95,50.4 MCU:C3.1 | MCU:C2.1 MCU:C1.1 91.9,40.8 v91.5,40.4 | 86.95,50.4 MCU:C9.1 85.95,48.9 85.2,48.15 85.15,48.15 v85.1,48.1 | MCU:C3.1 MCU:C10.1 82.75,48.5 82.75,48.25 81.35,46.85 MCU:C5.1 81.35,46.65 82.05,45.95 82.05,45.85 82.1,45.8 82.1,43.85 | MCU:C6.1 MCU:C8.1 81.74,43.5 82.1,43.85 | 82.1,43.85 82.3,43.65 83.95,43.65 84.85,42.75 MCU:U1.8 | MCU:C4.1 92.55,36.95 91.6,37.9 MCU:U1.47 87.7,37.9 87.1,37.3 87,37.3 v86.9,37.4 | MCU:SWD.4 91.85,28 MCU:R3.1 92.05,29.55 91.8,29.8 88.2,29.8 87.85,30.15 MCU:U1.35 87.85,32.1 86.1,33.85 85.6,33.85 85.6,33.9 v85.65,33.95 | MCU:C7.1 79.1,30.8 79.95,31.65 79.95,32.9 80.45,33.4 MCU:U1.23 83.05,33.4 v84.45,34.8 | MCU:U$1.4 80.72,26.32 80,27.15 80,29.6 MCU:C7.1 | MCU:BT1.GND 83.4,16.95 79.8,20.55 79.8,24.04 76.79,27.05 76.79,30.61 77.24,31.06 77.86,31.06 78.52,30.4 MCU:C7.1 | 56.75,34.3 57.75,34.3 59.25,35.8 59.25,35.85 59.75,36.35 59.75,37.13 PCM1794A:U$1.24 59.73,38.23 60.1,38.6 61.2,38.6 61.65,38.15 61.65,37.18 PCM1794A:U$1.27 | PCM2707:U$1.20 18.57,48.98 17.7,49.85 13.05,49.85 11.95,50.95 | PCM1794A:C5.- 40.87,25.63 v40.85,25.65 | 9.26,23.7 9.55,23.7 v9.55,23 | U$1.4 35.1,47.67 v35.1,49.8
  Top 0.4: PCM1794A:U$1.11 PCM1794A:U$1.12 | J2.GND1 4.99,37.89 5.35,38.25 | 5.35,38.25 8.3,41.2 8.3,43.18 PCM2707:C6.- | 5.35,38.25 5.61,37.99 C1.2 5.6,35.65 4.8,34.85 4.8,34.15 4.6,33.95 4,33.95 2.3,32.25 2.3,30 3.07,29.23 PCM2707:C1.2 PCM2707:C4.1 | PCM2707:C5.- v14.94,35.25 14.94,36.19 15.35,36.6 15.35,37.84 PCM2707:U$1.1 | PCM2707:U$1.31 12.85,40.15 12.3,40.7 12.25,40.7 v12.2,40.65 12.2,40.95 9.2,43.95 12.5,43.95 12.7,44.15 PCM2707:U$1.26 | PCM2707:U$1.20 18.57,44.83 18.85,44.55 v18.85,44.45 | v29.5,43.05 24.97,43.05 PCM2707:X1.2 | PCM2707:U$1.9 24.9,39.35 26.35,40.8 28.85,40.8 29.55,41.5 29.55,43 v29.5,43.05 | LM2662:U$1.6 22.62,28.38 24,29.75 26.49,29.75 v26.95,30.2 PCM2707:C3.- 29.89,31.64 32.95,34.7 32.95,36.11 C2.- 33.1,36.8 35.4,39.1 35.4,41.4 U$1.2 | AMPLIFIER:C7.2 30.25,18.5 v31.25,19.5 AMPLIFIER:C9.2 33.15,20.5 AMPLIFIER:C8.2 34.25,23.7 AMPLIFIER:C5.2 | PCM1794A:R6.2 53.19,24.41 54,23.6 55.91,23.6 PGA4311:U$1.4 57.34,23.7 57.95,24.3 | 57.95,24.3 57.95,25.7 57.45,26.2 56.03,26.2 PGA4311:U$1.2 57.28,26.23 v57.58,26.52 58,26.95 58,30.05 56.75,31.3 | AMPLIFIER:C5.2 36.07,23.74 AMPLIFIER:C6.2 | AMPLIFIER:C6.2 36.14,21.51 AMPLIFIER:C10.2 34.3,21.45 34.3,21.5 34.25,21.55 | LM2662:C2.+ 36.87,25.72 36.2,25.05 36.2,23.87 AMPLIFIER:C6.2 | 35.33,47.15 U$1.4 | 35.33,47.15 U$1.2 | PCM1794A:U$1.27 61.67,36.12 62.35,35.45 63.05,35.45 PCM1794A:C4.2 | 55.3,39.7 56.45,39.05 56.48,38.48 PCM1794A:U$1.19 56.45,37.13 56.45,35.55 56.75,35.25 56.75,34.3 PCM1794A:C9.- | 55.3,39.7 54.45,38.6 54.5,38.6 | 54.5,38.6 54.5,37.18 PCM1794A:U$1.16 | PCM1794A:C6.1 52.47,37.92 53.55,39 54.1,39 54.5,38.6
  Top 0.4: PCM1794A:C9.- 56.75,31.3 | PCM1794A:C9.- 55.22,34.05 PCM1794A:R8.1 52.05,34 52.05,32.65 51.5,32.1 | PCM1794A:U$1.12 55.17,46.05 PCM1794A:C1.1 55.5,46.37 55.61,46.37 57.16,47.92 | PGA4311:C1.- 66.75,47.05 | 64.65,44.95 66.75,47.05 | 64.65,44.95 62.87,44.95 PCM1794A:U$1.1 | PGA4311:U$1.11 55.99,14.85 58.6,14.85 59.91,13.54 PGA4311:U$1.17 PGA4311:U$1.18 68.66,14.8 69.25,15.4 69.25,16.8 68.7,17.35 PGA4311:U$1.20 68.34,17.34 69.25,18.25 69.25,23.25 68.8,23.7 | AMPLIFIER:IC1.3 48.13,11.33 49.4,12.6 | 49.4,12.6 49.35,12.6 48.1,13.85 48.1,15.1 AMPLIFIER:IC1.12 | AMPLIFIER:IC1.5 50.67,11.33 49.4,12.6 | 50.65,13.85 49.4,12.6 | 50.65,13.85 50.65,15.11 AMPLIFIER:IC1.10 | PGA4311:U$1.11 54.95,14.8 53.9,13.75 53.9,13.45 53.25,12.8 51.7,12.8 50.65,13.85 | v51.4,32 50.35,30.95 PGA4311:C2.+ 47.45,29.55 43.53,25.63 PCM1794A:C5.- | U$1.2 35.32,41.47 33.8,39.95 32.24,39.95 32.01,40.19 32.01,40.54 v29.5,43.05 | PCM1794A:U$1.12 55.23,40.17 55.3,39.7 | 66.75,47.05 66.1,47.05 65.6,47.55 v65.6,47.65 | v58.6,51.15 58.6,50.01 PCM1794A:C3.- 57.16,48.43 57.16,47.92 | 64.65,44.95 65.75,43.85 65.75,40.95 66,40.7 PCM1794A:R7.1 | 68.8,23.7 69.4,24.3 PGA4311:R3.1 69.39,26.23 PGA4311:U$1.27 65.11,26.23 64.95,26.4 v65,26.4 | 68.8,23.7 PGA4311:U$1.25 | PCM1794A:U$1.8 57.77,45.33 57.82,45.37 57.82,47.17 57.85,47.2 57.6,47.45 v57.55,47.35 57.67,47.4 57.16,47.92 | v51.45,44.35 51.45,45.4 PCM1794A:C2.- | AMPLIFIER:C5.2 34.29,24.59 v35,25.3 35.05,25.35 | MCU:J7.2 81.19,56.41 79.8,57.8 74.33,57.8 73.48,56.95 69.45,56.95 v68.15,55.65 | 68.1,55.6 67.15,54.65 42.83,54.65 35.33,47.15 | PGA4311:U$1.11 57.1,14.8 58.4,16.1 58.4,16.35
  Top 0.4: 58.4,16.35 58.4,16.7 57.8,17.3 56.05,17.3 PGA4311:U$1.9 | LM2662:U$1.3 22.62,22.23 23.75,23.35 27.25,23.35 27.61,23.71 29.21,23.71 31.43,25.93 v31.38,25.98 | 58.4,16.35 60.5,16.35 60.6,16.25 v60.75,16.25 | v60.15,22.95 59.3,22.95 57.95,24.3 | MCU:BT1.GND 85.8,9.1 89.3,5.6 93.2,5.6 96.9,9.3 MCU:J8.2 | 53.4,12.95 53.4,12.3 54.5,11.2 54.5,10.53 54.73,10.29 55.46,10.29 v59.45,6.3 61.95,3.8 v62,3.85 | 56.75,31.3 55.45,31.3 55.1,30.95 55.05,30.95 v55,30.9 | 31.1,32.85 31.35,32.85 31.95,32.25 v32.15,32.25 | 38.84,50.66 38.44,50.66 38.15,50.95 37.75,50.95 v37.7,50.9
  Top 0.406: 51.5,32.1 51.4,32.1 v51.4,32
  Top 0.5: PCM2707:U$1.26 PCM2707:U$1.25
  Top 0.8: PCM2707:C5.- 14.95,30.5 11.73,27.28 LM2662:C1.- 9.26,23.7 4.85,23.7 | AMPLIFIER:J1.SLEEVE 5.45,11.4 3.15,13.7 3.15,22 4.85,23.7 | 4.85,23.7 4.85,24.7 3.85,25.7 3.85,27.23 PCM2707:C4.1 | PCM2707:U$1.25 13.88,47.12 11.95,49.05 11.95,50.95 11.95,51.88 X1.1
  Top 1: 68.1,55.6 68.15,55.6 v68.15,55.65
  Bottom 0.3: v91.5,40.4 92.5,40.4 MCU:BOOT0.1 MCU:BOOT1.1 | v91.5,40.4 90.15,40.4 87.15,37.4 v86.9,37.4 86.95,37.35 86.95,36.55 85.15,34.75 v84.45,34.8 85.35,33.95 v85.65,33.95 | v85.1,48.1 85.1,46.8 v91.5,40.4 | v40.85,25.65 35.35,25.65 v35,25.3
  Bottom 0.4: v12.2,40.65 12.2,37.55 14.3,35.45 14.94,35.45 v14.94,35.25 | v18.85,44.45 18.85,44.4 20.55,43.05 v29.5,43.05 | v65.6,47.65 65.25,47.65 63.95,48.95 60.7,48.95 58.6,51.05 v58.6,51.15 | v57.55,47.35 56.45,47.4 55.05,46 54.73,45.94 53.19,45.94 51.55,44.3 51.5,44.3 v51.45,44.35 | v35,25.3 32.05,25.3 v31.38,25.98 27.05,30.3 v26.95,30.2 | v60.75,16.25 60.75,17.43 61.38,18.22 61.32,18.71 61.3,18.73 61.3,21.7 60.15,22.85 v60.15,22.95
  pour Bottom (isolate 0.254): 1,2.5 71,2.5 71,57.5 1,57.5
LM2662:FC
  Top 0.4: LM2662:U$2.P$1 18.96,20.35 LM2662:U$1.1
LM2662:N$1
  Top 0.4: LM2662:U$1.2 21.36,22.5 22.95,24.1 25.97,24.1 LM2662:C3.+
LM2662:N$2
  Top 0.4: LM2662:U$1.4 28.14,21.47 LM2662:C3.-
MCU:!EEPROM_CS!
  Top 0.3: MCU:R6.1 80.55,24.1 MCU:U$1.1
MCU:!EEPROM_HOLD!
  Top 0.3: MCU:R7.1 75.31,22.1 73.98,23.43 73.98,24.68 74.3,25 74.95,25 MCU:U$1.7
MCU:!RST!  (via drill 0.4)
  Top 0.3: 84.65,52.5 MCU:U$2.P$1 85.45,51.8 v85.7,51.55 | 84.65,52.5 MCU:U$2.P$2 | MCU:R8.1 84.5,52.65 84.65,52.5 | MCU:C8.2 81.1,45.35 80,46.45 80,46.5 v80.05,46.55 | MCU:U1.7 85.35,43.35 v84.9,43.8
  Bottom 0.3: v80.05,46.55 82.2,46.55 | 82.2,46.55 84.95,43.8 v84.9,43.8 | 82.2,46.55 82.25,46.55 85.7,50 v85.7,51.55 | v85.7,51.55 85.7,51.6 85.75,51.65 85.75,51.6 v85.7,51.55
MCU:!W!
  Top 0.3: MCU:R5.1 79.1,26.55 79.95,25.7 80.8,25.7 MCU:U$1.3
MCU:I2C2_SCL
  Top 0.3: MCU:U1.21 79.14,34.4 MCU:J4.2
MCU:I2C2_SDA
  Top 0.3: MCU:J4.1 78.65,32.9 79.65,33.9 MCU:U1.22
MCU:N$1
  Top 0.3: MCU:U1.1 90.55,40.1 91.2,39.45 91.9,39.45 93.3,40.85 93.3,42.06 93.2,42.16 93.2,43.7 93.85,44.35 93.85,44.76 93.71,44.9 93.71,46.21 94.2,46.7 98.5,46.7 99.25,45.95 99.25,42.25 98.5,41.5 98.5,38.15 99.25,37.25 99.25,36.15 98.55,35.3 98.55,16.2 97.75,15.4 97.57,15.4 MCU:BT1.PWR@1
MCU:N$2
  Top 0.3: MCU:C10.2 83.3,47.15 MCU:Y1.P$1 83.4,45.3 84.4,45.3 85.85,43.85 MCU:U1.6
MCU:N$3
  Top 0.3: MCU:U1.5 86.35,44.55 MCU:Y1.P$2 87,47.05 MCU:C9.2
MCU:N$4
  Top 0.3: MCU:U1.4 86.85,43.1 87.15,43.4 88.48,43.4 MCU:Y3.1 90.4,44.18 MCU:C2.2
MCU:N$5
  Top 0.3: MCU:U1.3 87.35,42.4 87.6,42.65 89.3,42.65 89.55,42.4 91.05,42.4 MCU:C1.2 91.9,44.28 MCU:Y3.2
MCU:N$6
  Top 0.3: MCU:U1.31 85.85,29.3 86.55,28.6 86.55,24 87.05,23.5 87.05,21.87 MCU:J5.3
MCU:N$7
  Top 0.3: MCU:BOOT0.2 95,44.73 93.71,43.44 93.71,42.36 95.1,40.97 MCU:R1.1
MCU:N$8  (via drill 0.4)
  Top 0.3: MCU:R1.2 95,36.9 94,37.9 94,38.2 94,39.65 v93.65,40 | MCU:U1.44 v88,36.4
  Bottom 0.3: v93.65,40 92.95,40 92.4,39.45 91.15,39.45 88.1,36.4 v88,36.4
MCU:N$9
  Top 0.3: MCU:U1.32 86.35,29.45 86.95,28.85 86.95,24.51 MCU:J5.2
MCU:N$10
  Top 0.3: MCU:R2.1 97.35,40.15 96.5,41 96.5,44.04 MCU:BOOT1.2
MCU:N$11  (via drill 0.4)
  Top 0.3: MCU:U1.20 82.85,34.9 83.2,34.55 v83.15,34.55 | v98.5,36.85 97.4,36.85 MCU:R2.2
  Bottom 0.3: v83.15,34.55 83.2,34.55 84.65,33.15 88.15,33.15 91.4,36.85 v98.5,36.85
MCU:N$12
  Top 0.3: MCU:U1.33 86.85,29.55 88.3,28.1 MCU:J5.1
MCU:N$14
  Top 0.3: MCU:U1.30 85.35,29.25 86.15,28.45 86.15,23.75 86.7,23.2 86.7,21.35 86.95,21.1 86.95,19.43 MCU:J5.4
MCU:N$15
  Top 0.3: MCU:U1.29 84.85,29.15 85.75,28.25 85.75,23.5 86.3,22.95 86.3,17.54 MCU:J5.5
MCU:PA15
  Top 0.3: MCU:U1.38 90.85,33.4 92.1,32.15 93,32.15 93.4,31.75 93.4,28.1 94.55,26.95 94.55,19.52 MCU:GPIO.8
MCU:PB3
  Top 0.3: MCU:U1.39 90.95,33.9 92.25,32.6 93.25,32.6 93.85,32 93.85,28.3 94.95,27.2 94.95,21.66 MCU:GPIO.7
MCU:PB4
  Top 0.3: MCU:U1.40 91.05,34.4 92.4,33.05 93.45,33.05 94.25,32.25 94.25,28.6 95.4,27.45 95.4,23.75 MCU:GPIO.6
MCU:SPI1_MISO  (via drill 0.4)
  Top 0.3: MCU:J1.2 75.35,33.1 76.65,34.4 76.65,35.9 77.65,36.9 MCU:U1.16 | MCU:U$1.2 79.53,25.02 77.55,27 v77.55,30.3 | v77.55,30.3 77.55,30.35 v77.55,30.3
  Bottom 0.3: v77.55,30.3 77.55,30.39 MCU:J1.2
MCU:SPI1_NSS
  Top 0.3: MCU:U1.14 75.58,37.9 MCU:J1.4
MCU:SPI2_MISO
  Top 0.3: MCU:U1.27 83.85,27.25 82.9,26.3 82.9,24.36 MCU:J6.2
MCU:SPI2_MOSI
  Top 0.3: MCU:U1.28 84.35,25.75 MCU:J6.1
MCU:SPI2_NSS
  Top 0.3: MCU:U1.25 82.85,27.6 82.15,26.9 82.15,26.86 82,26.71 82,23.79 82.45,23.34 82.45,21.55 82.93,21.07 82.91,21.06 82.91,19.27 MCU:J6.4
MCU:SPI2_SCK
  Top 0.3: MCU:U1.26 83.35,27.35 82.5,26.5 82.5,24 82.95,23.55 82.95,21.77 MCU:J6.3
MCU:SWDCLK
  Top 0.3: MCU:U1.37 90.05,32.3 MCU:R4.1 92.9,29.75 92.9,27.89 93.25,27.54 93.25,24.55 91.85,23.15 MCU:SWD.3
MCU:SWDIO
  Top 0.3: MCU:U1.34 87.35,30.1 88.25,29.2 89.95,29.2 90.25,28.9 MCU:R3.2 90.55,27.9 90.55,22.4 91.85,21.1 MCU:SWD.2
MCU:USART2_CTS  (via drill 0.4)
  Top 0.3: MCU:U1.10 83.85,41.45 83.55,41.75 83.55,41.8 v83.5,41.85
  Bottom 0.3: MCU:J3.4 78.6,49.82 78.6,45.54 82,42.14 83.21,42.14 v83.5,41.85
MCU:USART2_RTS  (via drill 0.4)
  Top 0.3: MCU:U1.11 83.35,41 82.8,41.55 81.35,41.55 80.75,42.15 80.75,42.2 v80.5,42.45
  Bottom 0.3: MCU:J3.3 78.09,47.79 78.09,45.33 80.5,42.93 v80.5,42.45
MCU:USART2_RX  (via drill 0.4)
  Top 0.3: MCU:U1.13 80.8,38.4 79.95,39.25 79.95,39.3 v79.9,39.35
  Bottom 0.3: v79.9,39.35 79.9,40.9 MCU:J3.1
MCU:USART2_TX
  Top 0.3: MCU:U1.12 82.8,40.1 81.85,41.05 80.8,40.95 78.25,43.5 78.25,44.99 MCU:J3.2
N$1
  Top 0.4: J2.D-1 4.74,39.84 6.6,41.7 6.6,43 5,44.6 1.9,44.6 1.27,45.23 1.27,54.62 3.75,57.1 13.45,57.1 14.85,55.7 14.85,52.45 15.45,51.85 16.4,51.85 16.6,51.65 16.6,50.82 PCM2707:R4.2
N$2  (via drill 0.4)
  Top 0.4: PCM2707:R3.2 14.88,50.97 13.8,52.05 13.8,54.95 13.15,55.6 4.3,55.6 2.35,53.65 2.35,46.9 3.6,45.65 v5.6,45.65 7.35,43.9 7.35,41.25 5.3,39.2 J2.D+1 | PCM2707:R5.2 5.76,34.66 6.4,35.3 6.4,35.4 v6.55,35.55
  Bottom 0.4: v6.55,35.55 8.52,35.55 8.58,35.49 10.04,35.49 10.45,35.9 10.45,40.8 v5.6,45.65
N$3  (via drill 0.4)
  Top 0.3: PCM1794A:U$1.26 61.02,35.23 62.1,34.15 v62.1,34.2 | v53.75,25.45 54,25.45 54.5,24.95 55.98,24.95 PGA4311:U$1.3
  Bottom 0.3: v62.1,34.2 62.1,29.3 54.8,29.3 54.45,28.95 54.45,26.15 v53.75,25.45 53.7,25.5 53.65,25.5
N$4
  Top 0.3: PCM1794A:U$1.25 60.38,34.58 59.5,33.7 59.5,30 64.75,24.95 66.78,24.95 PGA4311:U$1.26
N$5
  Top 0.4: PCM2707:U$1.18 20.17,48.17 21.15,49.15 26.14,49.15 PCM1794A:R4.1
N$6  (via drill 0.4)
  Top 0.4: PCM1794A:R2.1 63.76,43.73 64.66,42.83 64.66,42.69 65.1,42.25 65.1,39.55 66.35,38.3 66.35,38.4 v66.2,38.55 | v19.35,39.75 19.35,39.65 18.55,38.85 18.55,37.88 PCM2707:U$1.5
  Bottom 0.4: v66.2,38.55 65.16,37.51 65.16,31.57 58.23,24.64 51.57,24.64 37.48,38.74 20.51,38.74 19.5,39.75 v19.35,39.75
N$7
  Top 0.4: PCM2707:U$1.19 19.37,49.22 21.3,51.15 26.08,51.15 PCM1794A:R3.1
N$8
  Top 0.4: PCM2707:U$1.17 21.12,46.44 22.48,47.81 23.82,47.81 24.65,46.98 PCM1794A:R1.1
N$9  (via drill 0.4)
  Top 0.4: PGA4311:U$1.10 55.02,16.07 54.25,16.85 54.25,21.05 53.7,21.6 52.45,21.6 51.4,22.65 50.19,22.65 49.13,21.59 49.09,21.59 48.6,21.1 47.65,22.05 47.65,24.7 50.25,27.3 50.8,27.3 51.1,27.6 51.1,29.4 51.5,29.8 52.5,29.8 53.65,30.95 53.65,32.15 v54.2,32.7 | PCM1794A:U$1.18 55.83,38.38 55.6,38.6 55.6,38.7 v55.7,38.65
  Bottom 0.4: v55.7,38.65 55.5,38.75 53.7,36.95 53.7,33.2 v54.2,32.7
N$10  (via drill 0.4)
  Top 0.4: PCM1794A:U$1.17 55.17,35.73 55.6,35.3 v55.6,35.2 | v58.8,34.25 58.8,26.25 62.8,22.2 v62.8,22.15 | v63.35,16.1 66.97,16.1 PGA4311:U$1.19
  Bottom 0.4: v55.6,35.2 55.6,35.1 56.65,34.25 58.7,34.25 | 58.8,34.05 58.7,34.25 | 58.7,34.25 v58.8,34.25 | v62.8,22.15 62.8,16.9 63.35,16.25 63.25,16.1 v63.35,16.1
N$11  (via drill 0.4)
  Top 0.3: v81.5,40.3 81.5,40.45 81.45,40.4 80.8,40.4 77.65,43.55 75.15,43.55 73.7,45 71.5,45 71.15,45.35 71.15,49.55 67.35,53.35 48.44,53.35 J3.2 | MCU:U1.2 87.85,41.45 v88.1,41.7
  Top 0.4: R1.1 43.5,48.41 J3.2
  Bottom 0.3: v81.5,40.3 86.9,40.3 88.3,41.7 v88.1,41.7
N$12  (via drill 0.4)
  Top 0.3: MCU:GPIO.1 96.15,35.7 92.75,35.7 91.05,37.4 MCU:U1.46 88.1,37.4 87.05,36.35 86.5,36.35 86.1,36.75 86.1,36.8 v86,36.9 | v84.45,35.95 84.45,36.95 83.3,38.1 v83.2,38 | v75.6,42.4 74.65,42.4 74.15,41.9 71.35,41.9 70.65,42.6 70.65,49.1 67.15,52.6 50.23,52.6 J3.3
  Top 0.4: R2.1 43.85,44.45 44.8,45.4 44.8,47.17 J3.3 48.18,50.73 48.25,50.8
  Bottom 0.3: v86,36.9 85.45,36.9 84.45,35.9 v84.45,35.95 | v83.2,38 79.45,38 75.6,42.25 v75.6,42.4
N$13  (via drill 0.4)
  Top 0.3: MCU:U1.45 90.85,36.9 92.6,35.15 94.16,35.15 MCU:GPIO.2 | v84.65,37.8 84.8,37.8 83.75,38.85 82.75,38.85 82.2,39.4 81.15,39.4 79.05,41.5 78.05,40.5 75.45,40.5 73.85,38.9 71.35,38.9 70.15,40.1 70.15,48.85 67.15,51.85 54.9,51.85 R3.1
  Top 0.4: R3.1 51.07,50.9 J3.4
  Bottom 0.3: v84.65,37.8 84.65,37.1 82.15,34.6 82.15,34.55 83.95,32.75 96.56,32.75 MCU:GPIO.2
N$14  (via drill 0.4)
  Top 0.4: PCM1794A:R5.1 52.12,41.22 53.9,43 53.9,44.38 PCM1794A:U$1.14 53.9,44.43 v53.9,47.95
  Bottom 0.4: J3.1 43.15,50.55 45.4,48.3 53.5,48.3 v53.9,47.95
N$20  (via drill 0.4)
  Top 0.4: AMPLIFIER:IC1.9 51.94,16.71 51.7,16.95 51.7,17.66 AMPLIFIER:C3.2 51.55,19.64 AMPLIFIER:R3.2 51.55,20.51 v51.8,20.9 | PGA4311:U$1.8 58.09,18.61 v58.1,18.6
  Bottom 0.4: v58.1,18.6 53.9,18.6 51.85,20.65 51.85,20.85 v51.8,20.9
N$21  (via drill 0.4)
  Top 0.4: AMPLIFIER:IC1.13 46.86,16.73 AMPLIFIER:C4.2 47.82,19.66 AMPLIFIER:R4.2 47.96,19.8 49.65,19.8 50.6,20.75 v50.6,21.8 | PGA4311:U$1.21 59.77,18.61 59.75,18.6 v59.7,18.6 59.65,18.6 59.6,18.55
  Bottom 0.4: v59.7,18.6 59.45,18.6 58.6,19.45 54.6,19.45 52.3,21.8 v50.6,21.8
N$22  (via drill 0.4)
  Top 0.4: AMPLIFIER:R2.2 53.15,6.54 AMPLIFIER:C2.2 53.17,6.98 51.95,8.2 AMPLIFIER:IC1.6 51.94,6.69 51.25,6 51.25,6.1 v51.35,6.2 | v65.2,22.4 66.83,22.4 PGA4311:U$1.24
  Bottom 0.4: v51.35,6.2 56.45,6.2 66.6,16.35 66.6,21.55 65.7,22.4 v65.2,22.4
N$23  (via drill 0.4)
  Top 0.4: AMPLIFIER:R1.2 47.03,6.67 AMPLIFIER:C1.2 47.05,6.73 47.05,8.1 46.86,8.29 AMPLIFIER:IC1.2 46.85,11.3 47.4,11.85 v47.4,12.3 | PGA4311:U$1.5 52.88,22.43 51.95,23.35 49.6,23.35 v48.8,22.4
  Bottom 0.4: v48.8,22.4 48.8,13.55 47.5,12.25 47.45,12.25 v47.4,12.3
PCM1794A:MUTE  (via drill 0.4)
  Top 0.4: PCM1794A:U$1.10 56.48,40.08 56.4,40 v56.35,40 | v50.1,35.6 50.1,34.15 PCM1794A:R8.2
  Bottom 0.4: v56.35,40 54.55,40 50.2,35.65 50.15,35.65 v50.1,35.6
PCM1794A:N$1  (via drill 0.4)
  Top 0.4: PCM1794A:U$1.7 58.42,42.73 58.2,42.5 v58.15,42.5 | v29.6,48.95 PCM1794A:R4.2
  Bottom 0.4: v58.15,42.5 36.05,42.5 v29.6,48.95
PCM1794A:N$2  (via drill 0.4)
  Top 0.4: v29.45,50.95 28.12,50.95 PCM1794A:R3.2 | v59.5,46.25 59.5,46.15 59.1,45.75 59.1,44.43 PCM1794A:U$1.6
  Bottom 0.4: 29.4,50.9 v29.45,50.95 35.95,50.95 39.45,47.45 53.26,47.45 53.57,47.14 54.23,47.14 54.71,47.62 54.71,47.71 54.85,47.85 54.85,48.31 55.67,49.13 57.07,49.13 59.6,46.35 59.55,46.3 v59.5,46.25
PCM1794A:N$3  (via drill 0.4)
  Top 0.4: PCM1794A:R1.2 30.02,46.98 v30.85,46.15 | v59.85,41.15 59.85,43.4 59.75,43.5 59.75,44.38 PCM1794A:U$1.5
  Bottom 0.4: v30.85,46.15 31.3,46.15 35.75,41.7 58.5,41.7 59.1,41.15 v59.85,41.15
PCM1794A:N$4  (via drill 0.4)
  Top 0.4: PCM1794A:U$1.20 57.12,38.38 57.7,39.1 v57.7,39.25 | v52.45,26.2 PCM1794A:R6.1
  Bottom 0.4: 57.8,39.1 v57.7,39.25 54.8,39.3 53.05,37.5 53.05,26.8 v52.45,26.2 52.5,26.2
PCM1794A:N$5
  Top 0.4: PCM1794A:R2.2 60.82,45.87 60.4,45.45 60.4,44.43 PCM1794A:U$1.4
PCM1794A:N$9  (via drill 0.4)
  Top 0.3: PCM1794A:C7.- 65.55,32.35 v64.35,32.3 | v59.4,39.55 59.25,39.25 58.45,38.45 58.45,37.18 PCM1794A:U$1.22
  Bottom 0.3: v64.35,32.3 64.35,34.35 59.5,39.45 v59.4,39.55
PCM1794A:N$10  (via drill 0.4)
  Top 0.3: PCM1794A:U$1.21 57.77,35.67 57.9,35.55 v57.8,35.55 | v45.3,40.6 46.31,40.6 PCM1794A:C8.-
  Bottom 0.3: v57.8,35.55 59.2,35.55 61.3,33.45 61.3,30.65 60.6,29.95 54.4,29.95 53.95,29.5 53.95,26.6 52.65,25.3 51.7,25.3 45.5,31.5 45.5,40.6 45.45,40.65 45.35,40.65 v45.3,40.6
PCM1794A:V+  (1 unrouted)
  Top 0.3: PCM1794A:U$1.23 59.08,38.27 60.45,39.65 62.8,39.65 63.15,39.3 64.4,39.3 65.55,38.15 65.55,38.05 66.75,36.85 67.81,36.85 PCM1794A:C7.+
  Top 0.4: PCM1794A:C9.+ 63.43,32.52 64.02,33.11 65.57,33.17 68.2,35.8 68.2,37.06 PCM1794A:C7.+
PCM2707:INTRNL_D+
  Top 0.4: PCM2707:U$1.23 16.17,47.33 15.65,47.85 15.1,47.85 14.9,48.05 14.9,48.92 PCM2707:R3.1
PCM2707:INTRNL_D-
  Top 0.4: PCM2707:U$1.22 16.97,47.68 16.65,48 16.65,48.91 PCM2707:R4.1
PCM2707:INTRNL_HOST
  Top 0.4: PCM2707:R2.2 14.17,38.14 14.92,38.9 14.95,38.9 15.35,39.3 16.35,39.3 16.95,38.7 16.95,37.88 PCM2707:U$1.3
PCM2707:N$9
  Top 0.4: PCM2707:U$2.3 9.12,33.13 8.45,33.8 7.59,33.8 PCM2707:R5.1
PCM2707:RESONATOR_XTI
  Top 0.4: PCM2707:U$1.12 22.5,41.71 PCM2707:X1.1 27.45,41.71 PCM2707:R1.1
PCM2707:RESONATOR_XTO
  Top 0.4: PCM2707:U$1.13 23.15,42.55 23.41,42.82 23.47,42.82 23.8,43.15 23.8,44.05 23.9,44.15 25.21,44.15 PCM2707:X1.3 26.9,44.25 27.26,43.89 PCM2707:R1.2
PCM2707:USB+5V  (via drill 0.4)
  Top 0.4: PCM2707:R6.1 5.56,29.29 PCM2707:C1.1 PCM2707:C4.2 9.62,27.32 13.35,31.05 v13.35,31.15 13.35,31.3 12.5,32.15 12.5,33.1 11.95,33.65 11.3,33.65 PCM2707:U$2.2 | v16.5,36.2 16.5,36.5 16.15,36.85 16.15,37.84 PCM2707:U$1.2 | v16.95,31.9 18.11,33.06 PCM2707:C5.+ 20.39,33.06 20.55,32.9 | 20.55,32.9 21.85,31.6 23.54,31.6 PCM2707:C3.+ | PCM2707:R_CS.2 23.1,35.45 20.55,32.9 | PCM2707:U$1.30 14.75,40.95 15.55,41.75 15.55,42.15 | 15.55,42.15 15.55,42.75 14.95,43.35 | 14.95,43.35 PCM2707:U$1.27 | 15.55,42.15 15.6,42.2 v16.4,42.2 16.45,42.15 18.6,42.15 20.6,40.15 PCM2707:U$1.10 | 15.37,44.5 PCM2707:U$1.24 | 15.37,44.5 15.37,43.77 14.95,43.35 | PCM2707:U$1.21 17.77,45.17 17.25,44.65 | 17.25,44.65 15.52,44.65 15.37,44.5 | PCM2707:U$1.16 20.95,44.95 19.7,43.7 19.24,43.7 19.18,43.64 18.26,43.64 17.25,44.65
  Bottom 0.4: v13.35,31.15 16.2,31.15 v16.95,31.9 17.15,32.1 17.15,35.55 v16.5,36.2 16.5,42 16.25,42.25 16.35,42.25 v16.4,42.2
PCM2707:VCOM
  Top 0.4: PCM2707:U$1.32 9.27,39.35 PCM2707:C6.+
PULLUP_D+
  Top 0.3: MCU:U1.42 91.2,35.4 92.5,34.1 93.75,34.1 95.25,32.6 95.25,28.98 MCU:GPIO.4
  Top 0.4: PCM2707:R6.2 6.9,31.1 8.5,29.5 J4.1 9.75,29.1 11.2,30.55 11.2,31.81 PCM2707:U$2.1
  Bottom 0.3: 60.6,4.2 33.4,4.2 17.21,20.39 17.21,21.15 17,21.36 16.24,21.36 J4.1
  Bottom 0.4: 60.6,4.2 71.5,15.1 74.3,15.1 74.35,15.05 77.8,15.05 79.55,13.3 95.63,13.3 98.59,16.26 98.59,25 97.25,26.34 MCU:GPIO.4
SPI_MOSI  (via drill 0.4)
  Top 0.3: MCU:U1.17 78.15,36.4 77.15,35.4 77.15,34.19 76.7,33.74 76.7,31.95 75.35,30.6 MCU:J1.1 74.97,29.68 MCU:U$1.5
  Top 0.4: PCM2707:U$1.8 22.24,37.86 22.65,37.45 24.65,37.45 J1.1 | PGA4311:U$1.13 58.09,12.27 58.9,11.45 v58.95,11.5 | v66.4,30.1 75.3,30.1 MCU:J1.1
  Bottom 0.4: v58.95,11.5 58.95,11.95 62.1,15.1 62.1,26.7 | 62.1,26.7 63.6,28.2 64.35,28.2 66.3,30.15 66.35,30.15 v66.4,30.1 | 62.1,26.7 58.45,23.05 51.3,23.05 48.7,25.65 48.04,25.65 43.28,30.41 31.69,30.41 J1.1
SPI_SCK  (via drill 0.4)
  Top 0.3: MCU:J1.3 75.35,35.65 77.1,37.4 MCU:U1.15 | MCU:U$1.6 75.1,25.8 75.62,25.8 75.83,26 75.83,26.65 75.8,26.67 v75.8,28.3 | PGA4311:U$1.15 68.19,10.99 70.9,13.7 70.9,27 70.9,26.95 v70.95,26.9
  Top 0.4: PCM2707:U$1.7 20.17,38.67 20.6,39.1 21.23,39.1 21.66,38.67 23.27,38.67 23.34,38.75 25.89,38.75 J1.2 | v39.35,33.85 39.35,33.9 41.35,35.9 41.35,38.35 v41.1,38.6 | v69.25,39.85 69.25,39.55 70.83,37.97 70.83,36.27 71.2,35.9 74.58,35.9 MCU:J1.3
  Bottom 0.3: 75.75,35.1 75.72,35.13 MCU:J1.3 73.86,33.64 73.86,29.51 75.27,28.3 v75.8,28.3 74.4,26.9 v70.95,26.9
  Bottom 0.4: J1.2 27.24,37.26 30.7,33.8 39.35,33.8 39.45,33.7 39.45,33.75 v39.35,33.85 | v41.1,38.6 38.6,41.1 34.76,41.1 28.64,47.22 28.64,51.28 29.25,51.89 55.55,51.89 56.03,51.87 57.51,50.39 57.53,50.39 57.69,50.22 57.85,50.05 63.95,43.31 64.18,43.31 67.69,39.8 69.25,39.8 v69.25,39.85
USB+5V  (via drill 0.4, 0.6)
  Top 0.4: PCM2707:R2.1 11.74,36.25 | J2.VBUS1 3.89,40.49 5,41.6 v4.9,41.7 | C1.1 7.93,36.4 v9.25,36.4 9.31,36.34 PCM2707:R2.1 | 11.85,36.32 PCM2707:R2.1 | 23,46.85 23.1,46.85 v23.15,46.9 24.65,45.4 29.7,45.4 33.02,42.08 U$1.1 | v58.55,13.6 57.6,13.6 | PCM1794A:C5.+ 45,23.05 v46.75,23.05 46.75,25 PGA4311:R2.1 50.25,29.65 51.3,30.7 52.1,30.7 v52.15,30.75 | v42.8,35.4 42.85,35.35 42.95,35.35 46.1,32.2 v50,32.2 50.05,32.2 51.1,33.25 51.1,35.21 PCM1794A:C6.2 52.84,36.12 PCM1794A:U$1.15 53.88,35.88 54.45,35.3 v54.4,35.3 | 62.65,38.55 62.55,38.55 62.15,38.95 v61.95,38.95 | v58.55,46.35 58.55,46.95 60.05,48.45 61.98,48.45 PCM1794A:C3.+ | PGA4311:U$1.12 58.48,13.54 v58.55,13.6 | PGA4311:R1.1 63.75,8.4 v58.55,13.6
  Top 0.406: PCM1794A:U$1.28 62.33,38.23 62.65,38.55 63.57,38.55 PCM1794A:C4.1
  Top 0.5: 23.1,52.8 v23.15,52.75 23.15,53.3 21.2,55.25 20.35,55.25 D1.A
  Bottom 0.4: v9.25,36.4 9.3,36.35 9.3,36.3 9.4,36.4 9.4,38.45 6.15,41.7 v4.9,41.7 4.9,43.5 3.6,44.8 3.6,45.5 7.3,49.2 11.28,49.2 11.38,49.1 13.8,49.1 18.4,53.7 22.2,53.7 v23.15,52.75 | 23.15,52 v23.15,46.9 26.19,43.86 29.83,43.86 34.34,39.35 37.73,39.35 41.67,35.4 v42.8,35.4 | v58.55,13.6 50.1,13.6 47.5,11 46.75,11 45.6,12.15 45.6,12.95 47.75,15.1 47.75,21.95 46.7,23 v46.75,23.05 | v52.15,30.75 51.35,30.75 50,32.1 v50,32.2 | 61.95,39.95 v61.95,38.95 | 61.95,39.95 61.95,42.79 61.38,43.36 61.09,43.36 58.45,46 58.45,46.25 v58.55,46.35 | v54.4,35.3 57.54,38.44 58.03,38.44 58.3,38.71 58.34,38.74 58.35,38.76 58.59,39 58.59,39.88 58.95,40.24 61.66,40.24 61.95,39.95
  Bottom 0.5: v23.15,52.75 23.15,52
V+  (via drill 0.4, 0.6)
  Top 0.4: AMPLIFIER:U$1.3 v30.45,14.1 AMPLIFIER:U$1.18 31.01,17.07 31.01,17.42 31.9,18.3 34.55,18.3 34.95,18.7 AMPLIFIER:C9.1 35.5,19.5 36.3,20.3 36.85,20.3 AMPLIFIER:C10.1 | AMPLIFIER:C10.1 38.1,21.35 39.65,21.35 41.68,19.32 41.68,19.16 42.14,18.7 v42.8,18.7 | AMPLIFIER:IC1.4 49.4,7.2 v49.45,7.15 | 68.21,42.51 PGA4311:C1.+ 68.05,42.2 68.05,40 69.8,38.25 v69.8,37.7 | AMPLIFIER:C6.1 37.94,21.51 AMPLIFIER:C10.1 | PGA4311:U$1.7 v64.35,19.89 PGA4311:U$1.22
  Top 0.5: D2.C 19.05,52.9 D1.C
  Top 0.6: v18.25,28.4 18.25,26.91 18.45,26.71
  Top 0.61: v19.05,51.65 19.05,52.9
  Top 0.8: LM2662:U$2.P$2 10.71,20.35 LM2662:C1.+ | LM2662:U$1.8 18.45,26.71 17.07,26.71 LM2662:C1.+ | LM2662:C1.+ 16.53,25.57 17.85,24.25 17.95,24.25 v18,24.2
  Bottom 0.4: v42.8,18.7 42.75,18.65 42.7,18.65 42.3,18.25 42.3,8.4 43.55,7.15 v49.45,7.15 54.46,7.15 54.49,7.12 55.71,7.12 64.16,15.57 64.16,19.49 64.55,19.89 v64.35,19.89 64.35,23.56 64.19,23.72 64.19,26.75 67.21,29.77 67.21,35.01 69.8,37.6 v69.8,37.7
  Bottom 0.6: 19.16,46.48 17.84,45.16 17.84,43.74 18.14,43.44 18.3,43.31 18.3,28.4 v18.25,28.4
  Bottom 0.61: 19.16,46.48 19.16,51.49 19,51.65 v19.05,51.65
  Bottom 0.8: v18,24.2 18,22.7 26.7,14 30.45,14 v30.45,14.1
V-  (via drill 0.4)
  Top 0.4: LM2662:U$1.5 23.89,27.5 25.15,28.75 27.5,28.75 27.9,29.15 31.99,29.15 LM2662:C2.- | LM2662:C2.- 32.05,29.05 32.05,27.35 32.49,26.91 AMPLIFIER:C5.1 32.45,23.7 AMPLIFIER:C8.1 32.4,21.55 31.65,21.55 29.8,19.7 28.65,19.7 27.95,19 AMPLIFIER:C7.1 27.95,16.55 AMPLIFIER:U$1.20 AMPLIFIER:U$1.1 | PGA4311:U$1.6 v59.25,21.16 PGA4311:U$1.23 | PGA4311:U$1.23 67.34,21.16 67.5,21 67.16,21 PGA4311:U$1.23 | AMPLIFIER:IC1.11 49.4,16.3 50.45,17.35 v50.45,17.4 | LM2662:C2.- 33.95,30.95 PGA4311:C2.- 42.95,30.65 v42.95,29.6
  Bottom 0.3: 60.75,18.4 60.75,19.66 v59.25,21.16
  Bottom 0.4: 60.75,18.4 59.95,17.4 v50.45,17.4 50.45,20.3 49.8,20.95 49.8,22.8 43.05,29.55 43,29.55 v42.95,29.6 | v59.25,21.16 59,21.16
ZCEN  (via drill 0.4)
  Top 0.3: MCU:U1.41 91.1,34.9 92.5,33.5 93.64,33.5 94.74,32.39 94.74,28.76 95.75,27.75 95.75,25.94 MCU:GPIO.5
  Top 0.4: PGA4311:U$1.28 68.86,27.5 PGA4311:R3.2 69.4,28.15 70.4,29.15 70.4,29.25 v70.5,29.35 | v85.7,15.75 85.7,14.1 88.45,11.35 91.15,11.35 94.9,15.1 94.9,15.05 v94.85,15
  Bottom 0.4: v70.5,29.35 70.5,29.25 69.5,28.25 69.5,23.55 70.25,22.8 70.25,22.1 71.45,20.9 73.4,20.9 75.75,18.55 79.85,18.55 82.45,15.95 85.35,15.95 85.7,15.9 v85.7,15.75 | v94.85,15 94.85,22.04 MCU:GPIO.5
ZERO  (via drill 0.4)
  Top 0.4: R1.2 42,46.15 41.95,46.1 41.9,46.1 v41.85,46.15 | PCM1794A:U$1.13 54.52,46.87 54.9,47.44 55.59,47.44 56.3,48.15 56.3,48.2 v56.35,48.25
  Bottom 0.4: v56.35,48.25 56.35,48.2 55.2,47.05 54.94,47 54.48,46.54 42.24,46.54 v41.85,46.15

## Text on the board
Top: (3.3V) + - | + –